# Altium PCB MainBoard.PcbDoc
Units mil, origin at the board's own origin, x right, y up, seen from the top; angles counter-clockwise.
Board outline 3937.01 x 1417.32 mil, 2 copper layers (Top Layer, Bottom Layer); 37 components, 32 nets, 140 pads, 17 vias.
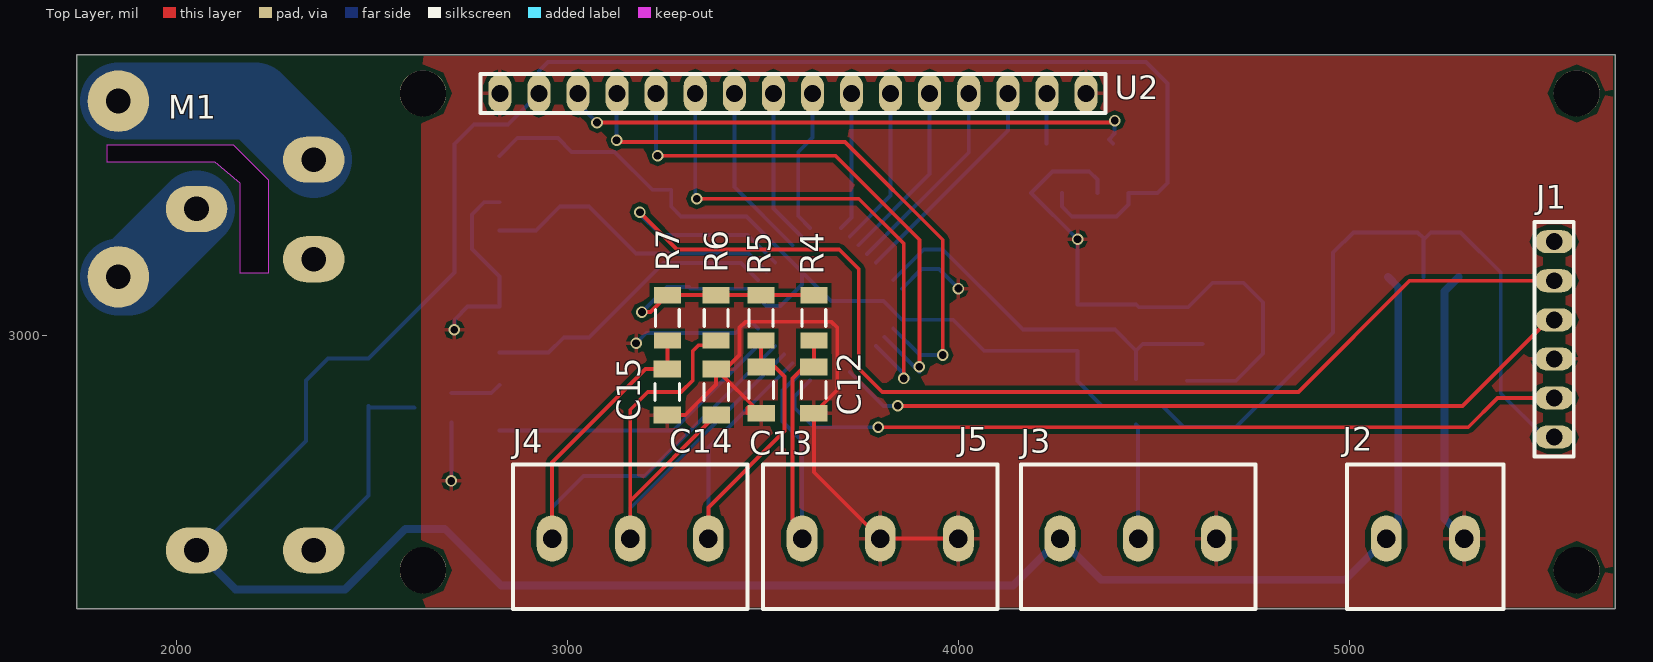
[diagram p0: Top Layer view]
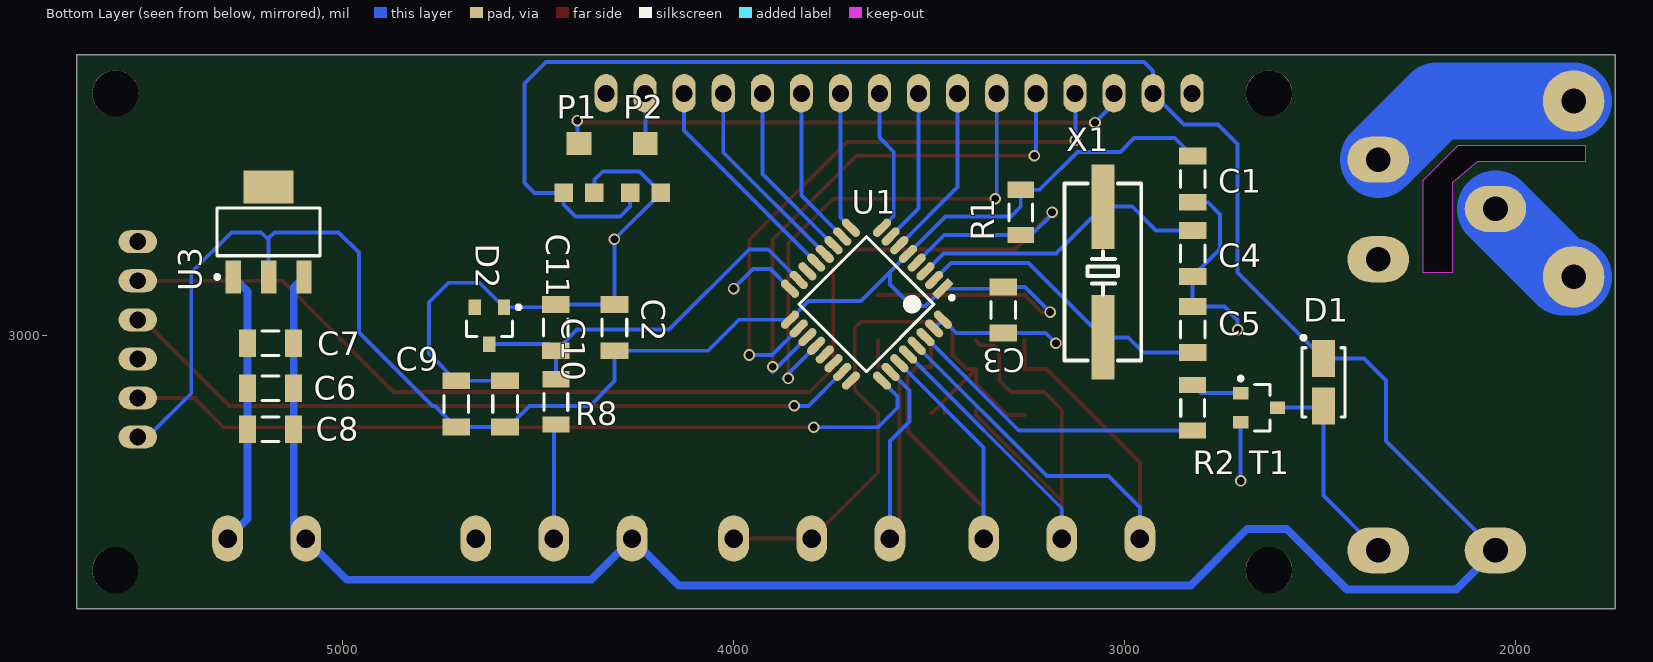
[diagram p1: Bottom Layer view, seen from below]

## Layer stack, top to bottom
Top Solder: solder mask 0.4, Solder Resist, Dk 3.5
Top Layer: signal copper 1.4
Dielectric 1: dielectric 12.6, FR-4, Dk 4.8
Bottom Layer: signal copper 1.4
Bottom Solder: solder mask 0.4, Solder Resist, Dk 3.5

## Board outline
5680.8,3718.14 1743.8,3718.14 1743.8,2300.82 5680.8,2300.82
cut-out: 1820,3487 1820,3445 2096.73,3445 2160,3391.46 2160,3160 2235,3160 2235,3397 2145,3487

## Design rules (kind name [scope] priority, off if disabled: settings)
Clearance Clearance_1 [All] p1: gap=10
Clearance [InComponent('U1')] p2: gap=4
PolygonConnect [All] p1: connectstyle=Relief reliefconductorwidth=10 reliefentries=4 polygonreliefangle="90 Angle" airgapwidth=10
RoutingVias [All] p1: holewidth=28 width=50 viastyle="Through Hole" minholewidth=28 minwidth=50 maxholewidth=28 maxwidth=50
SolderMaskExpansion [All] p1: expansion=4
Width [All] p1: maxlimit=354.33 minlimit=8 preferedwidth=10
30 further rules are at their usual default settings.

## Components (designator, comment, footprint, x,y, rotation, side; value= is the part's Value field where it differs from the comment)
C1 "Capacitor" CAP_1206 2825,3400 r90 bottom
C2 "Capacitor" CAP_1206 4305,3020 r270 bottom
C3 "Capacitor" CAP_1206 3310,3065 r90 bottom
C4 "Capacitor" CAP_1206 2825,3210 r90 bottom
C5 "Capacitor" CAP_1206 2825,3015 r270 bottom
C6 "10uF" CAP_1206 5185,2865 r180 bottom
C7 "10uF" CAP_1206 5185,2980 r180 bottom
C8 "10uF" CAP_1206 5185,2760 r180 bottom
C9 "10uF" CAP_1206 4710,2825 r270 bottom
C10 "Capacitor" CAP_1206 4585,2825 r270 bottom
C11 "Capacitor" CAP_1206 4455,3020 r270 bottom
C12 "Capacitor" CAP_1206 3630,2860 r90 top
C13 "Capacitor" CAP_1206 3495,2860 r90 top
C14 "Capacitor" CAP_1206 3380,2855 r270 top
C15 "Capacitor" CAP_1206 3255,2855 r90 top
D1 "SS16" DO-214AC 2490,2880 r90 bottom
D2 "BZX84C3V3LT1G" SOT23-3 4625,3025 r270 bottom
J1 "SWD" PIN_HEADER_6P 5525,2740 r90 top
J2 "Terminal Block" TERMINAL_BLOCK_2P 5095,2480 r0 top
J3 "Terminal Block" TERMINAL_BLOCK_3P 4260,2480 r0 top
J4 "Terminal Block" TERMINAL_BLOCK_3P 2960,2480 r0 top
J5 "Terminal Block" TERMINAL_BLOCK_3P 3600,2480 r0 top
M1 "RELAY 10A 230VAC" Relay_10A 2050,2450 r90 top
P1 "Resistor" SMD_TRIM_POT 4435,3365 r180 bottom
P2 "Resistor" SMD_TRIM_POT 4265,3365 r180 bottom
R1 "Resistor" RES_1206 3265,3315 r90 bottom
R2 "Resistor" RES_1206 2825,2815 r270 bottom
R4 "Resistor" RES_1206 3630,3045 r90 top
R5 "Resistor" RES_1206 3495,3045 r90 top
R6 "Resistor" RES_1206 3380,3045 r90 top
R7 "Resistor" RES_1206 3255,3045 r90 top
R8 "3k3" RES_1206 4455,2830 r90 bottom
T1 "BC817" SOT23-3 2655,2815 r180 bottom
U1 "STM32F030K6T6" LQFP32 3660,3080 r315 bottom
U2 "HD44780" SOCKET_HEADER_16P 2826.47,3619.71 r0 top
U3 "LD1117-3V3" SOT223-3 5190,3265 r90 bottom
X1 "8MHz 30ppm" HC49 3055,2995 r90 bottom

## Footprints (in the part's own frame and the unit in brackets; to place one, negate y for a bottom-side part, rotate by r counter-clockwise, add the part's x,y. Pads: shape width x height; smd on the part's side, far side on the other; paste and mask are expansions set on the pad)
CAP_1206 [mm]
  rect 1.1x1.8 smd: 1(-1.5,0) 2(1.5,0)
  silkscreen extent -0.55,-0.8 0.55,0.8, body extent -1.6,-0.76 1.6,0.84, height 1
DO-214AC [mm] "Molded Diode, 2-Leads, Body 4,25x2,65mm, IPC Medium Density"
  rect 2.4x1.5 smd: 1(-1.55,0) 2(1.55,0)
  silkscreen extent -2.25,-1.4 3.02,1.43, body extent -2.5,-1.3 2.5,1.4, height 2.15
HC49 [mm]
  rect 5.5x1.5 smd: 1(0,0) 2(8.5,0)
  silkscreen extent -1.5,-2.5 10,2.5, body extent -2.1,-2.41 10.7,2.42, height 4.3
LQFP32 [mm] "TQFP, 32-Leads, Body 7,00x7,00mm, Pitch 0,80mm, IPC Medium Density"
  rect 1.45x0.55 smd: 1(-4.225,2.8)
  oval 1.45x0.55 smd: 2(-4.225,2) 3(-4.225,1.2) 4(-4.225,0.4) 5(-4.225,-0.4) 6(-4.225,-1.2) 7(-4.225,-2) 8(-4.225,-2.8) 17(4.225,-2.8) 18(4.225,-2) 19(4.225,-1.2) 20(4.225,-0.4) 21(4.225,0.4) 22(4.225,1.2) 23(4.225,2) 24(4.225,2.8)
  oval 0.55x1.45 smd: 9(-2.8,-4.225) 10(-2,-4.225) 11(-1.2,-4.225) 12(-0.4,-4.225) 13(0.4,-4.225) 14(1.2,-4.225) 15(2,-4.225) 16(2.8,-4.225) 25(2.8,4.225) 26(2,4.225) 27(1.2,4.225) 28(0.4,4.225) 29(-0.4,4.225) 30(-1.2,4.225) 31(-2,4.225) 32(-2.8,4.225)
  silkscreen extent -4.35,-3.1 3.1,3.75, body extent -4.54,-4.52 4.49,4.52, height 1.65
PIN_HEADER_6P [mm]
  oval 1.5x2.5 hole 1.1: 1(0,0) 2(2.54,0) 3(5.08,0) 4(7.62,0) 5(10.16,0) 6(12.7,0)
  silkscreen extent -1.27,-1.27 13.97,1.27, body extent -1.27,-1.27 13.97,1.27, height 8
Relay_10A [mm]
  oval 3x4 hole 1.6: 1(0,0) 2(0,-7.62) 3(22.2,0) 4(18.923,-7.62) 5(25.4,-7.62)
  body extent -1.5,-9 27.3,1.5, height 15.8
RES_1206 [mm] "Chip Resistor, 2-Leads, Body 3,20x1,60mm, IPC Medium Density"
  rect 1.05x1.75 smd: 1(-1.475,0) 2(1.475,0)
  silkscreen extent -0.55,-0.77 0.55,0.77, body extent -1.67,-0.86 1.68,0.87, height 0.85
SMD_TRIM_POT [mm]
  rect 1.2x1.2 smd: 1(0,0) 2(2,0)
  rect 1.6x1.5 smd: 3(1,3.2)
  body extent -0.55,-0.15 2.55,3.54, height 1.95
SOCKET_HEADER_16P [mm]
  oval 1.5x2.5 hole 1.1: 1(0,0) 2(2.54,0) 3(5.08,0) 4(7.62,0) 5(10.16,0) 6(12.7,0) 7(15.24,0) 8(17.78,0) 9(20.32,0) 10(22.86,0) 11(25.4,0) 12(27.94,0) 13(30.48,0) 14(33.02,0) 15(35.56,0) 16(38.1,0)
  silkscreen extent -1.27,-1.27 39.37,1.27, body extent -1.52,-1.25 39.62,1.25, height 8.55
SOT23-3 [mm] "SOT23, 3-Leads, Body 2,90x2,50mm, Pitch 0,95mm, IPC Medium Density"
  rect 1x0.8 smd: 1(-1.2,0.95) 2(-1.2,-0.95) 3(1.2,0)
  silkscreen extent -1.32,-1.5 0.7,2.02, body extent -1.28,-1.5 1.22,1.5, height 1.05
SOT223-3 [mm] "SOT223, 4-Leads, Body 6,50x7,00mm (avg), Pitch 2,30mm, IPC Medium Density"
  rect 2.15x1 smd: 1(-2.925,2.3) 2(-2.925,0) 3(-2.925,-2.3)
  rect 2.15x3.25 smd: 4(2.925,0)
  silkscreen extent -3.05,-3.35 1.55,3.48, body extent -3.48,-3.22 3.48,3.28, height 1.7
TERMINAL_BLOCK_2P [mm]
  oval 2x3 hole 1.2: 1(0,0) 2(5.08,0)
  silkscreen extent -2.54,-4.57 7.62,4.83, body extent -3.08,-4.83 7.65,4.67, height 15
TERMINAL_BLOCK_3P [mm]
  oval 2x3 hole 1.2: 1(0,0) 2(5.08,0) 3(10.16,0)
  silkscreen extent -2.54,-4.57 12.7,4.83, body extent -3,-4.65 12.81,4.85, height 15.05

## Part data
C1 C2 C3 C10 C11 C12 C13 C14 C15: library part "100n 50V 1206", "1206  100n 50V Capacitor"
C4 C5: library part "47pF 50V 1206_1", "1206  47pF 50V Capacitor"
C6 C7 C8 C9: "10uF 5% Capacitor"
D1: "RECTIFIER 1A 60V"
D2: "3V3 ZENER DIODE 225 mW SOT-23"
J1: "STM32 SWD CONNECTOR"
J2: library part "Terminal Block 2P", "5.08mm Terminal Blocks 2P"
J3 J4 J5: library part "Terminal Block 3P", "5.08mm Terminal Blocks 3P"
M1: library part "RELAY 5V 10A/230VAC G6RN", "MECH 5V 1xMORSE 10A/250AC S7001E5W 5DC"
P1 P2: library part 1k_TRIMPOT, "Trimmer Pot 1k"
R1 R4 R5 R6 R7: library part 10k, "1206 10k 5% Resistor"
R2: library part 470R, "1206  470R 5% Resistor"
R8: "1206  3k3 5% Resistor"
T1: "BC817 NPN-UNI 45V 0.5A 0.25W 200MHz SOT-23"
U1: "Value-line ARM 32bit MCU with 32k Flash"
U2: "16x2 CHARACTER DISPLAY"
U3: "3.3V low drop positive voltage regulator"
X1: library part XTAL_8MHZ, "8.000MHz QUARZ HC49 30ppm 20pF LOW PROFILE"

## Free pads (board coordinates)
  round 118.11 hole 118.11: 1(2629.62,2399.24) 1(2629.62,3619.71) 1(5582.38,2399.24) 1(5582.38,3619.71)
  round 157.48 hole 62.99: A1(1850,3600) A2(1850,3150)

## Via types
v1: diameter 29.53, hole 19.68, Top Layer to Bottom Layer, 17 vias

## Nets (pads, with @x,y where several pads share a name; then routed paths per layer and width w, separated by ;. In a path a pad name is that pad's centre, name@x,y a point inside that pad or via, vN(x,y) a via of type N, cw(c..) or ccw(c..) an arc to the next point about the centre after c; other vN are vias at no path point)
+3V3: C1.2 C2.2 C3.2 C9.2 C10.2 J1.1 R1.2 R4.2 R5.2 R6.2 R7.2 U1.1 U1.5 U1.17 U3.2 | length 4902.9
  Top Layer w10: v1(3190,3060) 3211.93,3060 R7.2 R6.2 R5.2 R4.2
  Bottom Layer w10: C1.2 2870.94,3505 2975,3505 3010,3470 3120,3470 3216.93,3373.07 R1.2 3265,3330 3290,3305 3457.27,3305 U1.5 3600,3162.27 ; v1(3190,3060) 3254.06,3124.06 C3.2 3314.38,3119.67 U1.1 3509.1,3075 3545,3075 3600,3130 3600,3162.27 ; U3.2 5190,3249 5175,3264 5011,3264 4959,3212 4959,3008 4771,2820 4764.06,2820 C9.2 C10.2 4576.06,2765.94 4522,2820 4368,2820 4305,2883 C2.2 4065.06,2960.94 3985.67,3040.33 U1.17 3807.9,3088 3674.27,3088 3600,3162.27 ; 5190,3245 5209,3264 5285,3264 5388,3161 5388,2852 5500,2740 J1.1
+5V: C6.2 C7.2 C8.2 D1.2 J2.1 J3.1 M1.1 P1.1 P2.1 U2.2 U3.3 | length 8006.5
  Bottom Layer w10: M1.1 2330,2730 2330,2885 2386.02,2941.02 D1.2 2710,3161.02 2710,3490 2760,3540 2846.76,3540 U2.2 2926.47,3676.47 2950,3700 4480,3700 4535,3645 4535,3390 4510,3365 P1.1 4435,3335 4405,3305 4290,3305 4265,3330 P2.1 ; J2.1 J2.1@5125.94,2510.94
  Bottom Layer w20: M1.1 2150,2350 2430,2350 2585,2505 2685,2505 2830,2360 4140,2360 J3.1 4365,2375 4990,2375 J2.1 ; U3.3 5125.94,3123.35 C7.2 C6.2 C8.2 J2.1@5125.94,2510.94
BRIGTHNESS: P2.3 U2.15 | length 129.1
  Bottom Layer w10: P2.3 4225.63,3618.87 U2.15
CONTRAST: P1.3 U2.3 | length 1491.5
  Top Layer w10: v1(3075,3545) 4395,3545 v1(4400,3550)
  Bottom Layer w10: U2.3 3026.47,3593.53 v1(3075,3545) ; P1.3 4385,3501.61 4400,3516.61 v1(4400,3550)
DISP_EN: U1.20 U2.6 | length 1324.2
  Top Layer w10: v1(3330,3350) 3745,3350 3860,3235 v1(3860,2890)
  Bottom Layer w10: U2.6 3326.47,3353.53 v1(3330,3350) ; U1.20 3872.27,2890 v1(3860,2890)
DISP_RS: U1.18 U2.4 | length 1510.8
  Top Layer w10: v1(3125,3500) 3130,3495 3710,3495 3960,3245 v1(3960,2950)
  Bottom Layer w10: v1(3125,3500) 3125,3618.24 U2.4 ; U1.18 3901.36,2950 v1(3960,2950)
DISP_RW: U1.19 U2.5 | length 1384.2
  Top Layer w10: v1(3230,3460) 3685,3460 3900,3245 v1(3900,2920)
  Bottom Layer w10: U2.5 3226.47,3463.53 v1(3230,3460) ; U1.19 3900,2906.81 v1(3900,2920)
GND: C1.1 C2.1 C3.1 C4.1 C5.1 C6.1 C7.1 C8.1 C9.1 C10.1 C11.1 C12.1 C13.1 C14.1 C15.1 D2.1 J1.3 J2.2 J3.3 J5.2 J5.3 P1.2 P2.2 T1.2 U1.16 U1.31 U1.32 U2.1 U2.16 U3.1 | length 4953.9
  Top Layer w10: C15.1 3300.94,2795.94 3380,2875 C14.1 ; C13.1@3460,2800.94 C13.1@3460,2814.06 ; C13.1 3493.11,2800.94 C14.1 ; J5.3 J5.2 3630,2650 C12.1 3690,2860.94 3690,3020 3675,3035 3455,3035 3440,3020 3440,2950 3404.06,2914.06 C14.1
  Bottom Layer w10: v1(2702.24,2627.76) T1.2 ; v1(2710,3015) 2710,3040 2744.06,3074.06 C5.1 C4.1 2755,3220.94 2755,3310 2785.94,3340.94 C1.1 ; v1(3175,2980) 3200.94,3005.94 C3.1 3430.05,3005.94 U1.32 U1.31 ; U1.16 3905.9,3170 3950,3170 v1(4000,3120) ; P1.2 4356.26,3398.74 4335,3420 4241.26,3420 P2.2 v1(4305,3246.26) C2.1 C11.1 4461.81,3072.24 D2.1 4650.35,3135 4730,3135 4780,3085 4780,2954.06 C9.1 C10.1
  Bottom Layer w20: U3.1 5244.06,3113.35 C7.1 C6.1 C8.1 5244.06,2530.94 J2.2
NetC4_2: C4.2 U1.3 X1.2 | length 777.6
  Bottom Layer w10: C4.2 2919.06,3269.06 2979.65,3329.65 X1.2 3174.65,3210 3463.19,3210 U1.3
NetC5_2: C5.2 U1.2 X1.1 | length 774.4
  Bottom Layer w10: C5.2 2950.94,2955.94 2990,2995 X1.1 3245,3185 3443.64,3185 U1.2
NetC11_2: C11.2 D2.3 R8.2 U1.15 | length 1011.2
  Bottom Layer w10: U1.15 3911.36,3220 3960,3220 4165,3015 4400.94,3015 C11.2 ; R8.2 C11.2 ; D2.3 4471.81,2977.76 C11.2
NetC12_2: C12.2 J5.1 R4.1 U1.26 | length 1022.6
  Top Layer w10: J5.1 3575,2505 3575,2890 3604.06,2919.06 C12.2 R4.1
  Bottom Layer w10: U1.26 3550,2858.64 3550,2780 3600,2730 J5.1
NetC13_2: C13.2 J4.3 R5.1 U1.27 | length 1172
  Top Layer w10: J4.3 3360,2560 3555,2755 3555,2895 3530.94,2919.06 C13.2 R5.1
  Bottom Layer w10: J4.3 3360,2713.19 U1.27
NetC14_2: C14.2 J4.2 R6.1 U1.28 | length 1626.6
  Top Layer w10: J4.2 3160,2575.94 ; C14.2@3380,2810 C14.2 3160,2575.94 ; R6.1 3368.07,2975 3335,2975 3320,2960 3320,2885 3290,2855 3205,2855 3160,2810 3160,2575.94
  Bottom Layer w10: J4.2 3160,2557.73 U1.28
NetC15_2: C15.2 J4.1 R7.1 U1.29 | length 1484.4
  Top Layer w10: J4.1 2960,2675 3199.06,2914.06 C15.2 R7.1
  Bottom Layer w10: J4.1 2960,2560 3040,2640 3197.73,2640 U1.29
NetD1_1: D1.1 M1.2 T1.3 | length 545.1
  Bottom Layer w10: M1.2 2490,2590 D1.1@2490,2816.02 ; D1.1 D1.1@2490,2816.02 ; T1.3 2606.73,2816.02 D1.1@2490,2816.02
NetM1_3: M1.3 pad.A2 | length 272.1
  Bottom Layer w196.85: pad.A2 1876,3150 M1.3
NetM1_5: M1.5 pad.A1 | length 562.1
  Bottom Layer w196.85: pad.A1 2200,3600 M1.5
NetR2_1: R2.1 T1.1 | length 131.3
  Bottom Layer w10: T1.1 2804.33,2852.4 R2.1
NetU1_6: U1.6 U2.7 | length 450.5
  Bottom Layer w10: U2.7 3426.47,3380.34 U1.6
NetU1_7: U1.7 U2.8 | length 396.1
  Bottom Layer w10: U2.8 3526.47,3324.88 U1.7
NetU1_8: U1.8 U2.9 | length 371.8
  Bottom Layer w10: U1.8 3590,3305.9 3590,3470 3626.47,3506.47 U2.9
NetU1_9: U1.9 U2.10 | length 355.2
  Bottom Layer w10: U1.9 3726.47,3302.37 U2.10
NetU1_10: U1.10 U2.11 | length 409.7
  Bottom Layer w10: U1.10 3826.47,3357.83 U2.11
NetU1_11: U1.11 U2.12 | length 464.2
  Bottom Layer w10: U1.11 3926.47,3413.29 U2.12
NetU1_12: U1.12 U2.13 | length 518.7
  Bottom Layer w10: U1.12 4026.47,3468.74 U2.13
NetU1_13: U1.13 U2.14 | length 573.1
  Bottom Layer w10: U1.13 4126.47,3524.2 U2.14
NRST: J1.5 R1.1 U1.4 | length 3202.4
  Top Layer w10: v1(3185,3315) 3280,3220 3695,3220 3745,3170 3745,2915 3805,2855 4870,2855 5155,3140 J1.5
  Bottom Layer w10: v1@3180,3315 3238.07,3256.93 R1.1 3460.8,3256.93 U1.4
PRESSURE_EXT: J3.2 R8.1 | length 294
  Bottom Layer w10: R8.1 4460,2766.93 J3.2
RELAY_CTRL: R2.2 U1.30 | length 782.9
  Bottom Layer w10: R2.2 3270.12,2756.93 U1.30
SWCLK: J1.2 U1.25 | length 2082.9
  Top Layer w10: v1(3795,2765) 5305,2765 5380,2840 J1.2
  Bottom Layer w10: U1.25 3580,2844.1 3580,2815 3630,2765 v1(3795,2765)
SWDIO: J1.4 U1.23 | length 1930.1
  Top Layer w10: v1(3845,2820) 5290,2820 5510,3040 J1.4
  Bottom Layer w10: U1.23 3808.64,2820 v1(3845,2820)
pads on no net: D2.2 J1.6 M1.4 U1.14 U1.21 U1.22 U1.24 U3.4

## Polygon pours and split planes (outlines as drawn)
GND on Top Layer "GND_TOP" (solid, remove dead copper, pour order 5): 2625,3715 2625,2305 5675,2305 5675,3715 2635,3715

## Silkscreen, mask and mechanical layers (free items; w line width, h text height)
Mechanical 1:
  the board outline again, w10